# EAGLE board remote_stepper (EAGLE 5.10)
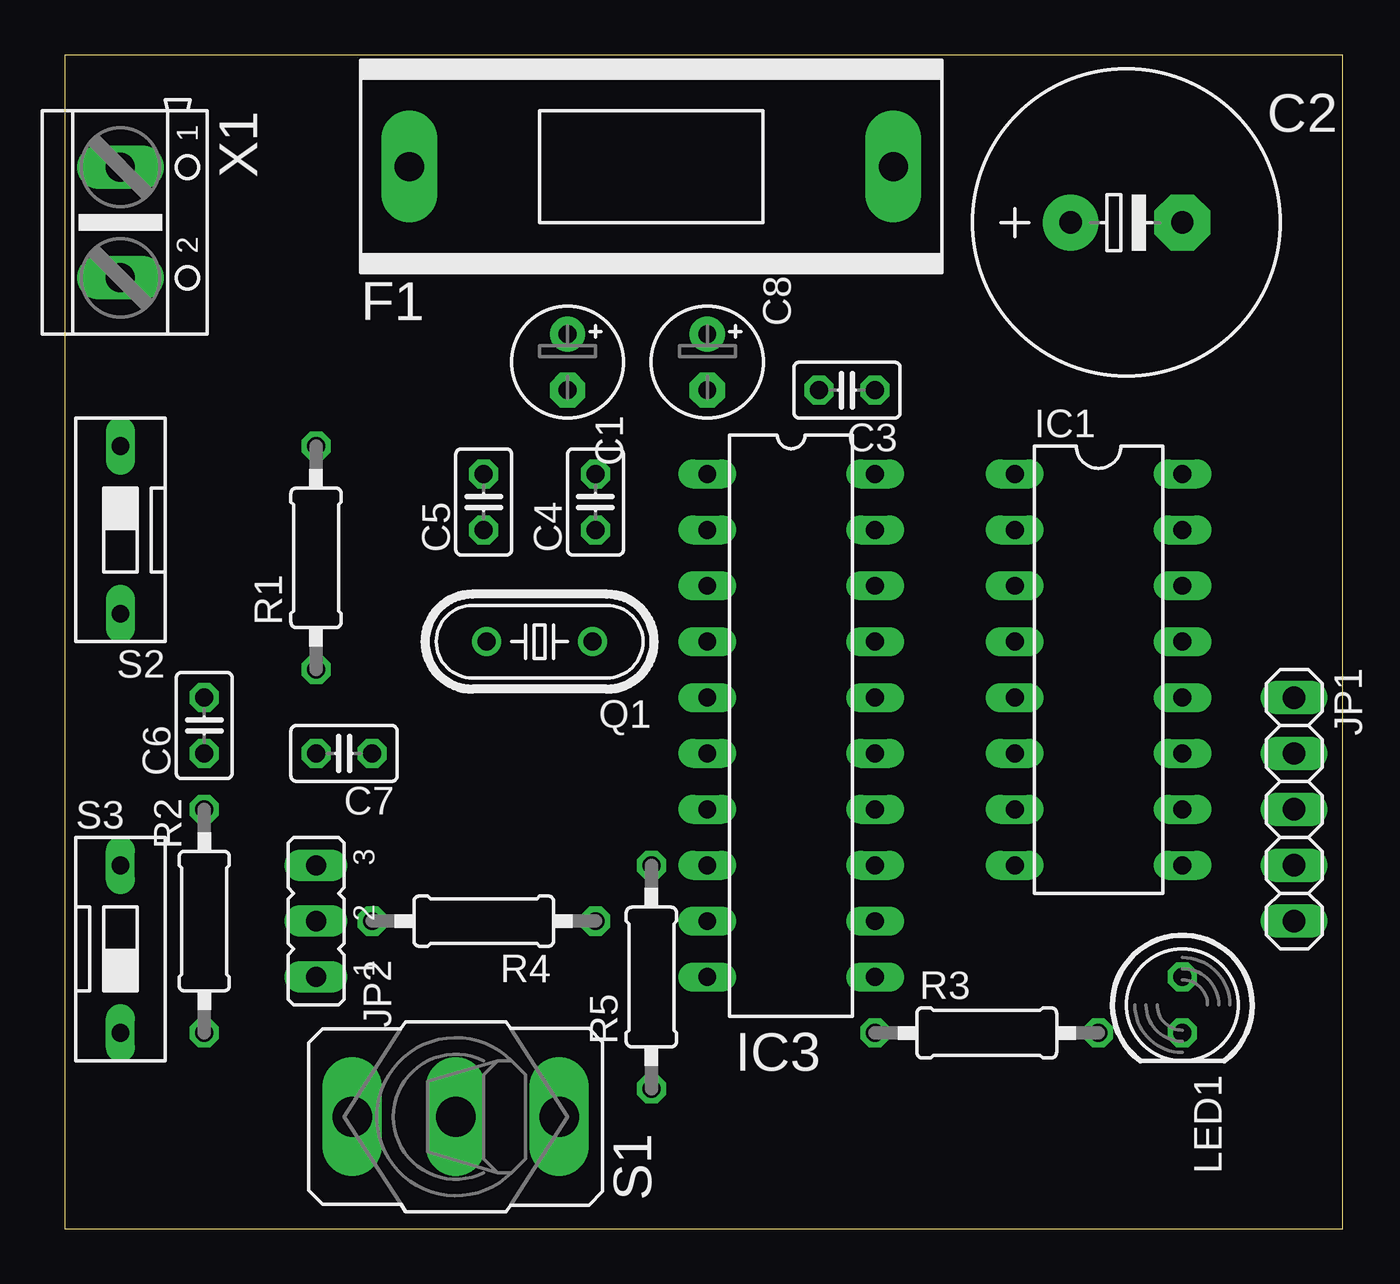
[diagram p0: board, top side]
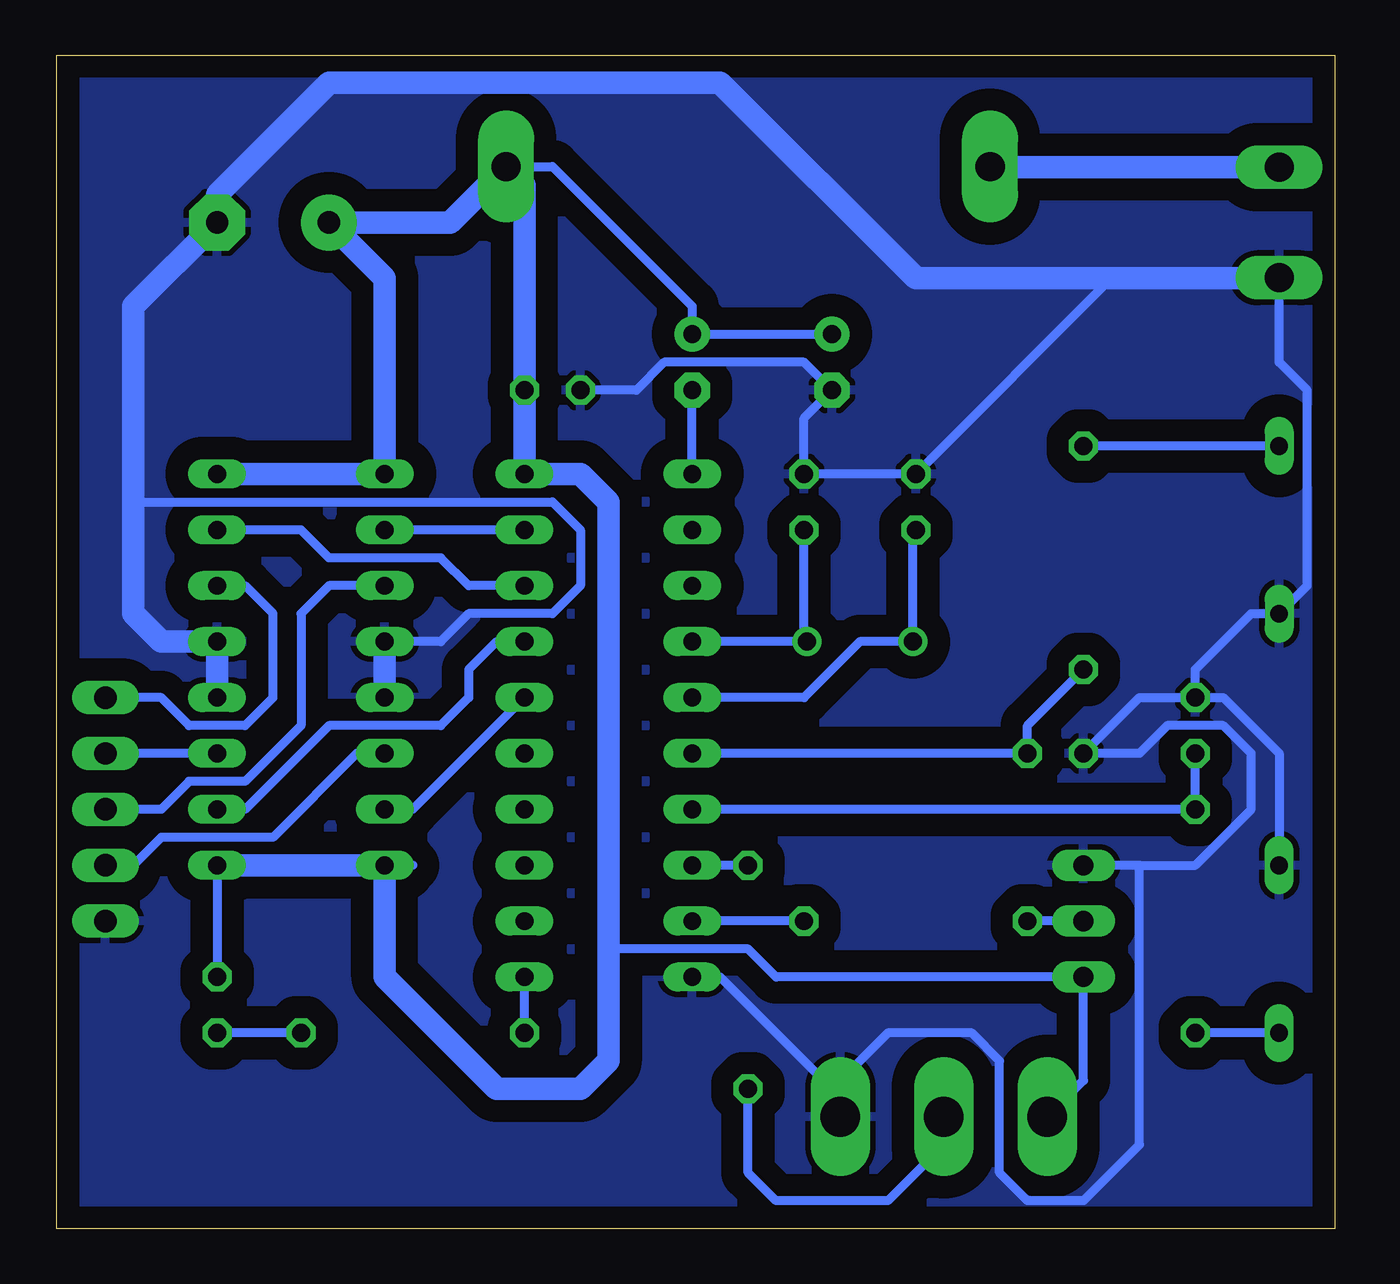
[diagram p1: board, bottom side, seen from below]

Size 58.09 x 53.33 mm. Coordinates in mm from the lower left corner, seen from the top.
Outline: 0,0 58.09,0 58.09,53.33 0,53.33 0,0
Copper layers (1*16): Top 0.035mm / dielectric 1.5mm / Bottom 0.035mm
Design rules "default": minimum track width 10mil, minimum drill 24mil, track to track 8mil, track to pad 8mil, pad to pad 8mil, via to via 8mil, smd to smd 8mil, copper to edge 40mil, drill to drill 8mil, minimum pad ring 10mil, minimum via ring 8mil, stop-mask expansion 4mil, vias tented up to drill 0mil, thermal gap 10mil

## Footprints (pad centres in the part's own frame; a part is rotated, then mirrored left to right if it is on the bottom)
E2,5-5 = drill 0.813 pad 1.6 round: + -1.27,0 | drill 0.813 pad 1.6 octagon: - 1.27,0
E5-13 = drill 1.016 pad 2.54 round: + -2.54,0 | drill 1.016 pad 2.54 octagon: - 2.54,0
C025-025X050 = drill 0.813 octagon: 1 -1.27,0; 2 1.27,0
SH22 = drill 1.321 pad 2.54 long: 1 -10.998,0; 2 10.998,0
DIL16 = drill 0.813 long: 1 -8.89,-3.81; 2 -6.35,-3.81; 3 -3.81,-3.81; 4 -1.27,-3.81; 5 1.27,-3.81; 6 3.81,-3.81; 7 6.35,-3.81; 8 8.89,-3.81; 9 8.89,3.81; 10 6.35,3.81; 11 3.81,3.81; 12 1.27,3.81; 13 -1.27,3.81; 14 -3.81,3.81; 15 -6.35,3.81; 16 -8.89,3.81
DIL20 = drill 0.813 long: 1 -11.43,-3.81; 2 -8.89,-3.81; 3 -6.35,-3.81; 4 -3.81,-3.81; 5 -1.27,-3.81; 6 1.27,-3.81; 7 3.81,-3.81; 8 6.35,-3.81; 9 8.89,-3.81; 10 11.43,-3.81; 11 11.43,3.81; 12 8.89,3.81; 13 6.35,3.81; 14 3.81,3.81; 15 1.27,3.81; 16 -1.27,3.81; 17 -3.81,3.81; 18 -6.35,3.81; 19 -8.89,3.81; 20 -11.43,3.81
1X05 = drill 1.016 long: 1 -5.08,0; 2 -2.54,0; 3 0,0; 4 2.54,0; 5 5.08,0
JP2 = drill 0.914 long: 1 -2.54,0; 2 0,0; 3 2.54,0
LED5MM = drill 0.813 octagon: A -1.27,0; K 1.27,0
HC49/S = drill 0.813 round: 1 -2.413,0; 2 2.413,0
0207/10 = drill 0.813 octagon: 1 -5.08,0; 2 5.08,0
M9040P = drill 1.803 long: 1 0,4.699; 2 0,0; 3 0,-4.699
DS-01 = drill 0.813 long: 1 0,-3.81; 2 0,3.81
AK500/2 = drill 1.321 long: 1 -2.515,0; 2 2.515,0

## Placement (x,y rotation side)
C1  4.7uF  [E2,5-5]  22.86,39.37 270 top
C2  1000uF  [E5-13]  48.26,45.72 0 top
C3  100nF  [C025-025X050]  35.56,38.1 180 top
C4  33pF  [C025-025X050]  24.13,33.02 90 top
C5  33pF  [C025-025X050]  19.05,33.02 90 top
C6  33pF  [C025-025X050]  6.35,22.86 90 top
C7  33pF  [C025-025X050]  12.7,21.59 180 top
C8  2.2uF  [E2,5-5]  29.21,39.37 270 top
F1  F 1A  [SH22]  26.67,48.26 0 top
IC1  L293D  [DIL16]  46.99,25.4 270 top
IC3  AT89C2051P  [DIL20]  33.02,22.86 270 top
JP1  ST.MOT.  [1X05]  55.88,19.05 270 top
JP2  UNIPOLAR/BIPOLAR  [JP2]  11.43,13.97 90 top
LED1  RED  [LED5MM]  50.8,10.16 270 top
Q1  24MHz  [HC49/S]  21.59,26.67 180 top
R1  2kR  [0207/10]  11.43,30.48 90 top
R2  2kR  [0207/10]  6.35,13.97 270 top
R3  1kR  [0207/10]  41.91,8.89 0 top
R4  2kR  [0207/10]  19.05,13.97 180 top
R5  2kR  [0207/10]  26.67,11.43 90 top
S1  TURBO  [M9040P]  17.78,5.08 90 top
S2  LEFT  [DS-01]  2.54,31.75 180 top
S3  RIGHT  [DS-01]  2.54,12.7 0 top
X1  PWR  [AK500/2]  2.54,45.72 270 top

## Library data of the parts
C1-C3 C8 R1-R5 = rcl
C4-C7 = resistor
F1 = fuse
IC1 = st-microelectronics
IC3 = atmel
JP1 = pinhead
JP2 = jumper
LED1 = led
Q1 = crystal
S1 = switch
S2 S3 = switch-dil
X1 = con-ptr500

## Nets
0V: C1.- C2.- C3.2 C4.2 C5.2 C6.2 C7.2 IC1.4 IC1.5 IC1.12 IC1.13 IC3.10 JP1.5 JP2.3 S1.3 S2.2 S3.2 X1.2
+5V: C1.+ C2.+ C3.1 C8.+ F1.2 IC1.1 IC1.8 IC1.9 IC1.16 IC3.20 JP2.1 LED1.A S1.1
N$1: F1.1 X1.1
N$2: IC1.2 IC3.19
N$3: C5.1 IC3.5 Q1.2
N$4: C4.1 IC3.4 Q1.1
N$5: C8.- IC3.1
N$6: IC1.15 IC3.18
N$7: IC1.10 IC3.17
N$8: IC1.7 IC3.16
N$9: IC1.14 JP1.1
N$10: IC1.11 JP1.2
N$11: IC1.3 JP1.3
N$12: IC1.6 JP1.4
N$13: R1.2 S2.1
N$14: R2.2 S3.1
N$15: IC3.11 R3.1
N$16: LED1.K R3.2
N$17: IC3.9 R4.1
N$18: JP2.2 R4.2
N$19: C7.1 IC3.6 R1.1
N$20: C6.1 IC3.7 R2.1
N$21: R5.1 S1.2
N$22: IC3.8 R5.2

## Tracks (layer width: path | path; a pad name or v marks a point on that pad's centre or on a via)
0V
  Bottom 0.406: IC3.10 27.94,11.43 22.86,6.35 | 22.86,6.35 22.86,5.46 S1.3 | S3.2 2.54,21.59 5.08,24.13 C6.2 | IC1.4 40.64,26.67 39.37,27.94 35.56,27.94 34.29,29.21 34.29,31.75 35.56,33.02 54.61,33.02 | C6.2 6.35,25.4 3.81,27.94 S2.2 1.27,29.21 1.27,38.1 2.54,39.37 X1.2 2.56,43.18 | C6.2 8.89,24.13 C7.2 8.89,21.59 7.62,22.86 5.08,22.86 3.81,21.59 3.81,19.05 6.35,16.51 8.89,16.51 | 10.16,43.18 C5.2 C4.2 24.13,36.83 C1.- 24.13,39.37 30.48,39.37 31.75,38.1 C3.2 | 8.89,16.51 JP2.3 | 8.89,16.51 8.89,3.81 11.43,1.27 13.97,1.27 15.24,2.54 15.24,7.62 16.51,8.89 20.32,8.89 22.86,6.35
  Bottom 1.016: IC1.12 IC1.13 53.34,26.67 54.61,27.94 54.61,33.02 54.61,41.91 C2.- 50.8,46.99 45.72,52.07 27.94,52.07 19.05,43.18 10.16,43.18 2.56,43.18 | IC1.4 IC1.5
  pour Bottom (isolate 1.016): 0,0 57.15,0 57.15,53.34 0,53.34
+5V
  Bottom 0.406: C1.+ C8.+ 29.21,41.91 35.56,48.26 F1.2 36.83,47.42 | IC1.8 41.91,16.51 | IC1.9 LED1.A | S1.1 11.43,6.73 JP2.1 25.4,11.43 26.67,12.7 33.02,12.7
  Bottom 1.016: F1.2 40.21,45.72 C2.+ 43.18,43.18 IC1.1 IC1.16 | IC1.9 IC1.8 43.18,11.43 38.1,6.35 34.29,6.35 33.02,7.62 33.02,12.7 33.02,22.86 33.02,33.02 34.29,34.29 IC3.20 C3.1 36.83,47.42
N$1
  Bottom 0.406: 15.24,48.23 15.24,48.26 F1.1
  Bottom 1.016: X1.1 15.24,48.23
N$2
  Bottom 0.406: IC3.19 IC1.2
N$3
  Bottom 0.406: IC3.5 24.13,24.13 21.59,26.67 Q1.2 19.18,31.62 C5.1
N$4
  Bottom 0.406: IC3.4 Q1.1 24.13,26.67 C4.1
N$5
  Bottom 0.406: IC3.1 C8.-
N$6
  Bottom 0.406: IC3.18 39.37,29.21 40.64,30.48 45.72,30.48 46.99,31.75 IC1.15
N$7
  Bottom 0.406: IC3.17 38.1,26.67 39.37,25.4 39.37,24.13 40.64,22.86 45.72,22.86 49.53,19.05 IC1.10
N$8
  Bottom 0.406: IC3.16 41.91,19.05 IC1.7
N$9
  Bottom 0.406: IC1.14 49.53,29.21 48.26,27.94 48.26,24.13 49.53,22.86 52.07,22.86 53.34,24.13 JP1.1
N$10
  Bottom 0.406: IC1.11 JP1.2
N$11
  Bottom 0.406: JP1.3 53.34,19.05 52.07,20.32 49.53,20.32 46.99,22.86 46.99,27.94 45.72,29.21 IC1.3
N$12
  Bottom 0.406: JP1.4 54.61,16.51 53.34,17.78 48.26,17.78 44.45,21.59 IC1.6
N$13
  Bottom 0.406: S2.1 R1.2
N$14
  Bottom 0.406: S3.1 R2.2
N$15
  Bottom 0.406: R3.1 IC3.11
N$16
  Bottom 0.406: R3.2 LED1.K
N$17
  Bottom 0.406: R4.1 IC3.9
N$18
  Bottom 0.406: JP2.2 R4.2
N$19
  Bottom 0.406: IC3.6 C7.1 13.97,22.86 R1.1
N$20
  Bottom 0.406: IC3.7 R2.1 C6.1
N$21
  Bottom 0.406: R5.1 26.67,2.54 25.4,1.27 20.32,1.27 17.78,3.81 S1.2
N$22
  Bottom 0.406: R5.2 IC3.8